# Altium PCB PCB.PcbDoc
Units mm, origin at the board's own origin, x right, y up, seen from the top; angles counter-clockwise.
Board outline 80 x 100 mm, 2 copper layers (Top Layer, Bottom Layer); 72 components, 53 nets, 209 pads, 7 vias.
Unrouted connection lines stored in the file: 1.
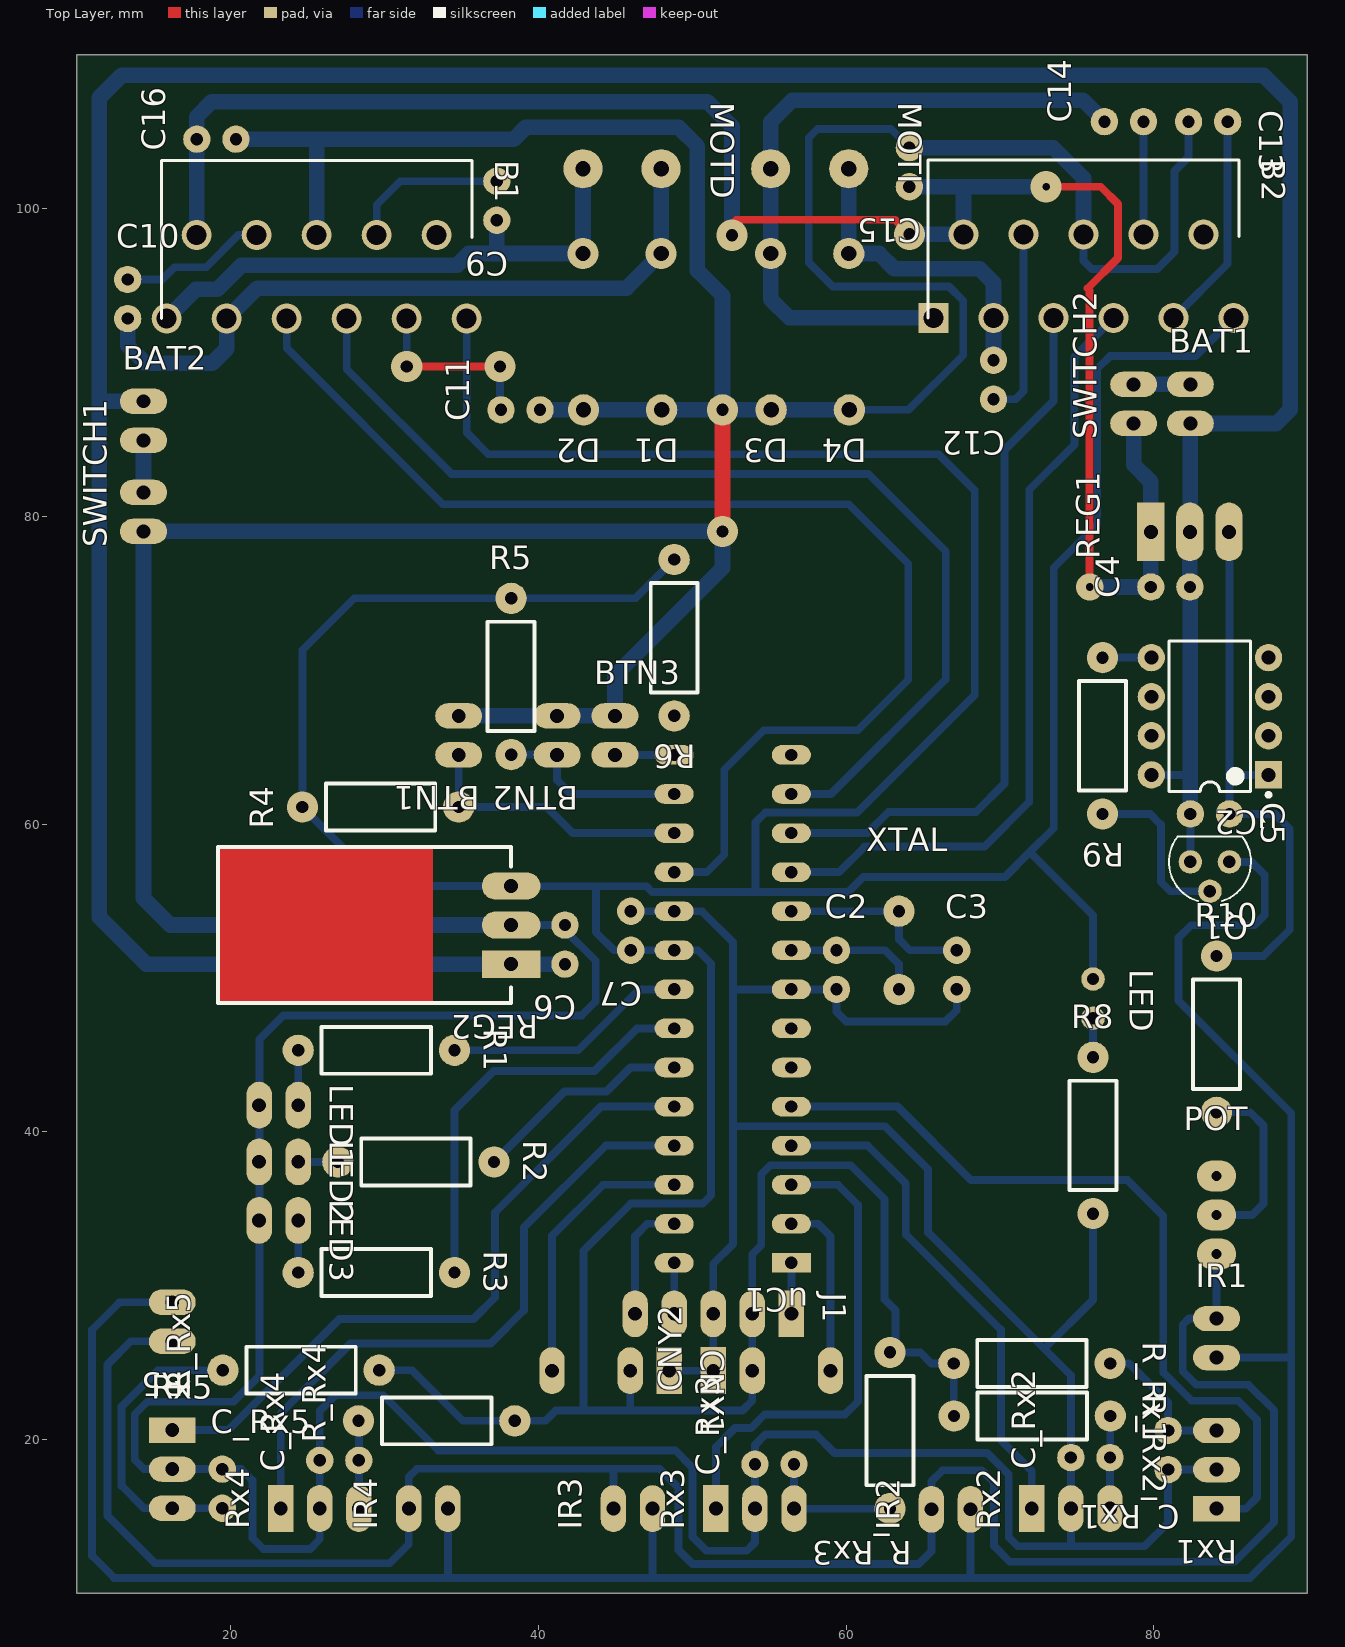
[diagram p0: Top Layer view]
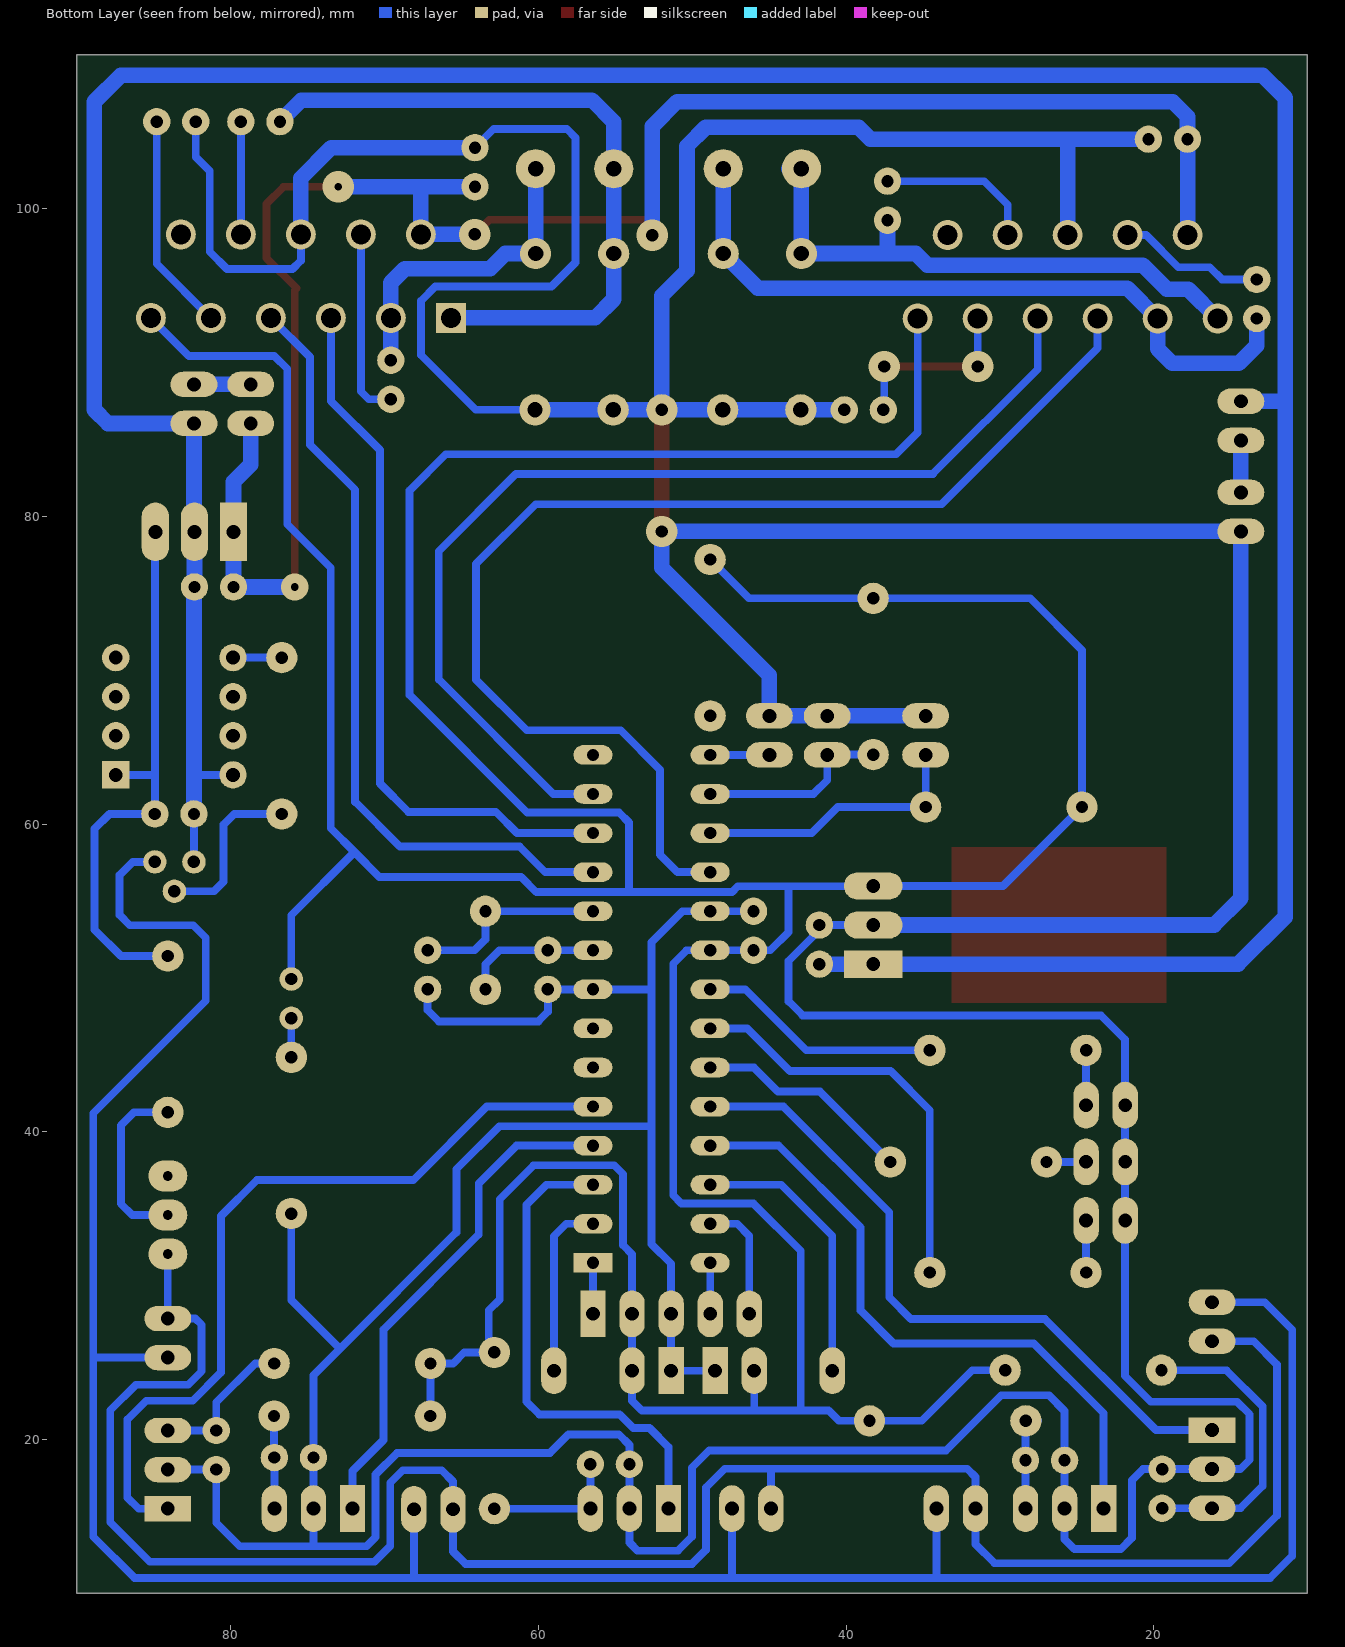
[diagram p1: Bottom Layer view, seen from below]
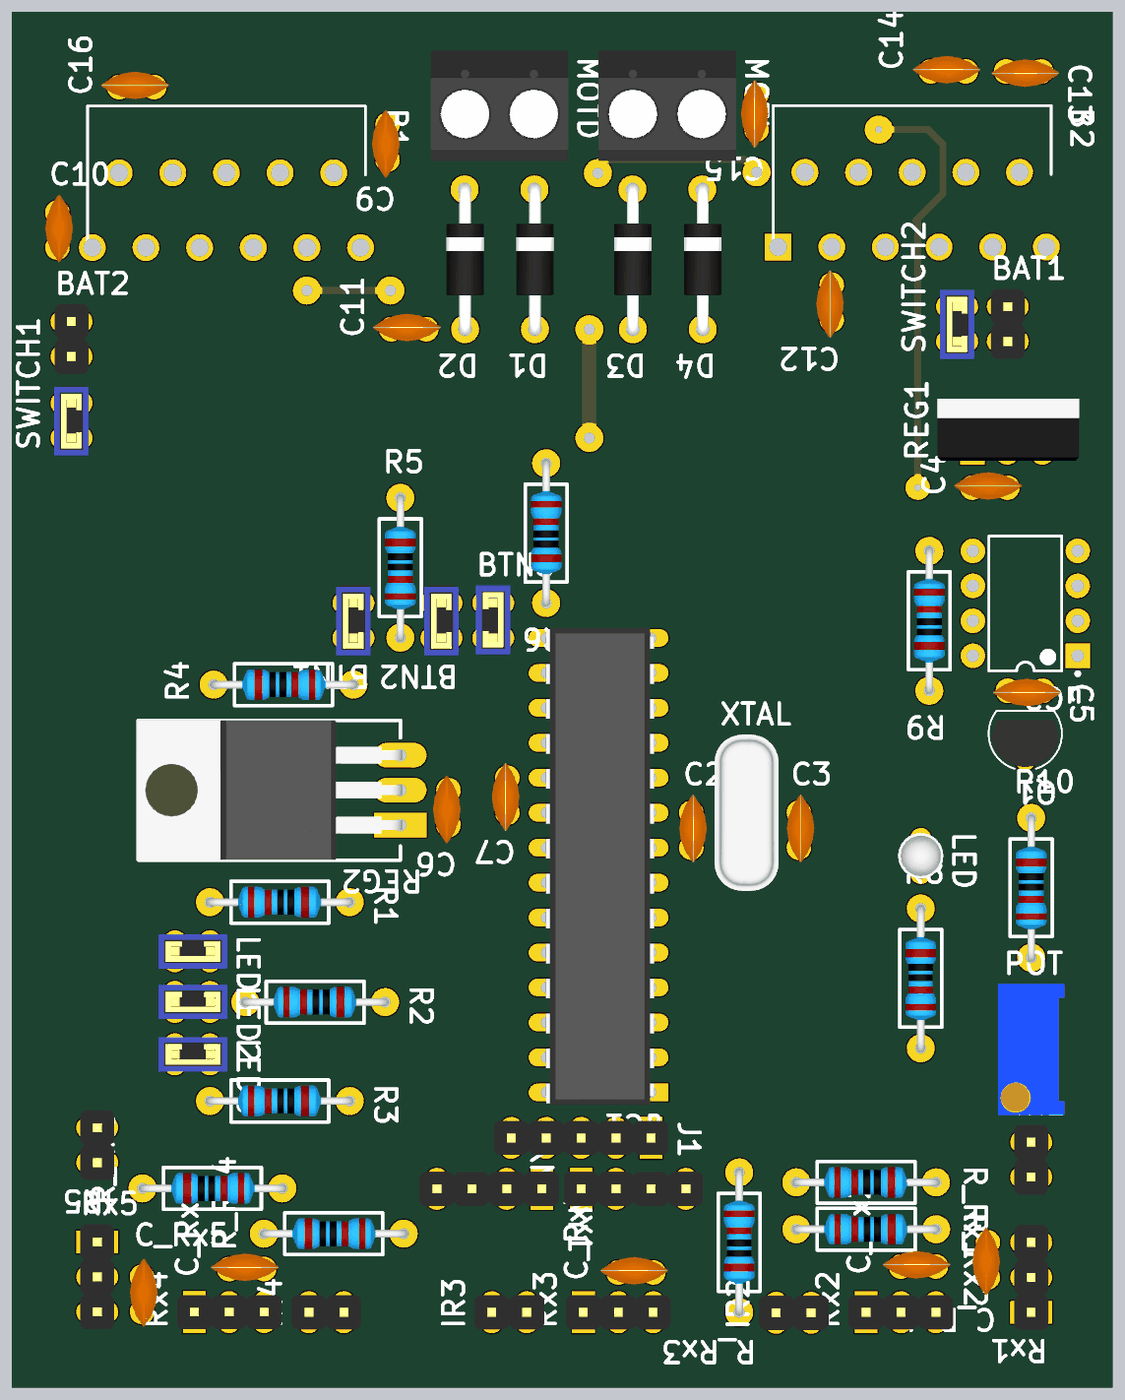
[diagram p2: 3D render of the assembled board from above, using the file's embedded part models]

## Layer stack, top to bottom
Top Solder: solder mask 0.0102, Solder Resist, Dk 3.5
Top Layer: signal copper 0.0356
Dielectric 1: dielectric 0.32, FR-4, Dk 4.8
Bottom Layer: signal copper 0.0356
Bottom Solder: solder mask 0.0102, Solder Resist, Dk 3.5

## Board outline
10,10 90,10 90,110 10,110

## Design rules (kind name [scope] priority, off if disabled: settings)
Clearance [All] p1: gap=0.254
PolygonConnect [All] p1: connectstyle=Relief reliefconductorwidth=0.254 reliefentries=4 polygonreliefangle="90 Angle" airgapwidth=0.254
RoutingVias [All] p1: holewidth=0.8 width=2.032 viastyle="Through Hole" minholewidth=0 minwidth=0 maxholewidth=2.54 maxwidth=2.54
SolderMaskExpansion [All] p1: expansion=0.102
Width [All] p1: maxlimit=1.27 minlimit=0.508 preferedwidth=0.762
30 further rules are at their usual default settings.

## Components (designator, comment, footprint, x,y, rotation, side; value= is the part's Value field where it differs from the comment)
B1 "L6203" TO195P500X2020X2210-11P#1 15.84,92.86 r0 top
B2 "L6203" TO195P500X2020X2210-11P#2 65.69,92.9 r0 top
BAT1 "" "HEADER 1x2" 82.389,87.31 r0 top
BAT2 "" "HEADER 1x2" 14.33,86.21 r0 top
BTN1 "JUMPER" JUMPER 34.82,65.76 r180 top
BTN2 "JUMPER" JUMPER 41.22,65.76 r180 top
BTN3 "JUMPER" JUMPER 44.98,65.76 r0 top
C2 "CAP-CER" CAP-CER 59.38,50.901 r90 top
C3 "CAP-CER" CAP-CER 67.2,50.901 r90 top
C4 "CAP-CER" CAP-CER 80.707,75.41 r180 top
C5 "CAP-CER" CAP-CER 84.04,60.655 r0 top
C6 "CAP-CER" CAP-CER 41.73,51.779 r270 top
C7 "CAP-CER" CAP-CER 46.01,52.679 r270 top
C9 "CAP-CER" CAP-CER 37.3,100.139 r270 top
C10 "CAP-CER" CAP-CER 13.3,94.511 r90 top
C11 "CAP-CER" CAP-CER 38.46,86.925 r180 top
C12 "CAP-CER" CAP-CER 69.59,88.499 r270 top
C13 "CAP-CER" CAP-CER 83.92,105.66 r0 top
C14 "CAP-CER" CAP-CER 77.689,105.66 r180 top
C15 "CAP-CER" CAP-CER 64.12,102.32 r270 top
C16 "CAP-CER" CAP-CER 18.689,104.52 r180 top
C_Rx1 "CAP-CER" CAP-CER 80.94,18.919 r270 top
C_Rx2 "CAP-CER" CAP-CER 75.509,18.81 r180 top
C_Rx3 "CAP-CER" CAP-CER 54.969,18.38 r180 top
C_Rx4 "CAP-CER" CAP-CER 26.679,18.63 r180 top
C_Rx5 "CAP-CER" CAP-CER 19.45,17.171 r90 top
CNY1 "CNY_HEADER" CNY_HEADER 44.7,24.46 r270 top
CNY2 "CNY_HEADER" CNY_HEADER 55.18,24.46 r90 top
D1 "DIODE" DO-41 47.98,92.64 r270 top
D2 "DIODE" DO-41 42.9,92.64 r270 top
D3 "DIODE" DO-41 55.1,92.64 r270 top
D4 "DIODE" DO-41 60.18,92.64 r270 top
IR1 "" "HEADER 1x2" 84.09,26.58 r0 top
IR2 "" "HEADER 1x2" 66.82,15.45 r90 top
IR3 "" "HEADER 1x2" 46.15,15.49 r90 top
IR4 "" "HEADER 1x2" 32.85,15.49 r90 top
IR5 "" "HEADER 1x2" 16.2,27.64 r180 top
J1 "" "Header 1x5" 56.45,28.16 r270 top
LED "LED" LED-3MM-RED 76.06,48.65 r270 top
LED1 "JUMPER" JUMPER 23.12,41.72 r270 top
LED2 "JUMPER" JUMPER 23.12,38.04 r270 top
LED3 "JUMPER" JUMPER 23.12,34.23 r270 top
MOTD "2-BLOCK_TERMINAL" BLOCK_TERMINAL-2 44.17,113.903 r270 top
MOTI "2-BLOCK_TERMINAL" BLOCK_TERMINAL-2 56.37,113.903 r270 top
POT "POT" POT-10TURN 84.09,34.58 r90 top
Q1 "2N2222A" TO-92 83.659,56.582 r180 top
R1 "RES" RES-Axial-400mil 24.39,45.29 r0 top
R2 "RES" RES-Axial-400mil 26.96,38.03 r0 top
R3 "RES" RES-Axial-400mil 24.39,30.84 r0 top
R4 "RES" RES-Axial-400mil 34.82,61.1 r180 top
R5 "RES" RES-Axial-400mil 38.23,64.51 r90 top
R6 "RES" RES-Axial-400mil 48.83,77.19 r270 top
R8 "RES" RES-Axial-400mil 76.06,34.672 r90 top
R9 "RES" RES-Axial-400mil 76.68,70.815 r270 top
R10 "" RES-Axial-400mil 84.09,41.255 r90 top
R_Rx1 "RES" RES-Axial-400mil 67.01,24.93 r0 top
R_Rx2 "RES" RES-Axial-400mil 67.02,21.52 r0 top
R_Rx3 "RES" RES-Axial-400mil 62.86,25.65 r270 top
R_Rx4 "RES" RES-Axial-400mil 38.47,21.2 r180 top
R_Rx5 "RES" RES-Axial-400mil 29.65,24.49 r180 top
REG1 "LM7805" TO-220-STRAIGHT 79.818,78.99 r90 top
REG2 "LM7805" TO-220-FLAT 38.23,50.89 r180 top
Rx1 "Header 1x3" "Header 1x3" 84.09,15.49 r180 top
Rx2 "Header 1x3" "Header 1x3" 72.08,15.49 r90 top
Rx3 "Header 1x3" "Header 1x3" 51.54,15.49 r90 top
Rx4 "Header 1x3" "Header 1x3" 23.25,15.5 r90 top
Rx5 "Header 1x3" "Header 1x3" 16.2,20.6 r0 top
SWITCH1 "JUMPER" JUMPER 14.33,80.29 r180 top
SWITCH2 "JUMPER" JUMPER 78.699,87.31 r180 top
uC1 "PIC18F2550" DIP28 56.45,31.47 r180 top
uC2 "PIC12F683-I/P" PDIP300-P8 83.66,67.005 r180 top
XTAL "" CRYSTAL-TH 63.44,51.282 r90 top

## Footprints (in the part's own frame and the unit in brackets; to place one, negate y for a bottom-side part, rotate by r counter-clockwise, add the part's x,y. Pads: shape width x height; smd on the part's side, far side on the other; paste and mask are expansions set on the pad)
BLOCK_TERMINAL-2 [mm]
  round 2.54 hole 1: 1(11.303,3.81) 2(11.303,-1.27)
  body extent 6.73,-3.73 14.73,6.27, height 10.16
CAP-CER [mil]
  round 70 hole 31.5: 1(-65,0) 2(35,0)
  body extent -107,-44 87,34, height 207
CNY_HEADER [mil]
  rect 120x65 hole 35.43: 1(0,150)
  oval 120x65 hole 35.43: 2(0,50) 3(0,-150)
  body extent -49,-200 49,200, height 336
CRYSTAL-TH [mil]
  round 80 hole 31.5: 1(-80,0) 2(120,0)
  body extent -203,-90 243,93, height 138
DIP28 [mm]
  rect 2.54x1.27 hole 0.8: 1(0,0)
  oval 2.54x1.27 hole 0.8: 2(0,-2.54) 3(0,-5.08) 4(0,-7.62) 5(0,-10.16) 6(0,-12.7) 7(0,-15.24) 8(0,-17.78) 9(0,-20.32) 10(0,-22.86) 11(0,-25.4) 12(0,-27.94) 13(0,-30.48) 14(0,-33.02) 15(7.62,-33.02) 16(7.62,-30.48) 17(7.62,-27.94) 18(7.62,-25.4) 19(7.62,-22.86) 20(7.62,-20.32) 21(7.62,-17.78) 22(7.62,-15.24) 23(7.62,-12.7) 24(7.62,-10.16) 25(7.62,-7.62) 26(7.62,-5.08) 27(7.62,-2.54) 28(7.62,0)
  body extent -0.25,-33.76 7.65,0.89, height 5.09
DO-41 [mil]
  round 80 hole 39.37: A(224.99,1.45) K(-175,0)
  body extent -192,-52 242,55, height 107
"HEADER 1x2" [mil]
  oval 120x65 hole 35.43: 1(0,50) 2(0,-50)
  body extent -49,-100 49,100, height 336
"Header 1x3" [mil]
  rect 120x65 hole 35.43: 1(0,0)
  oval 120x65 hole 35.43: 2(0,-100) 3(0,-200)
  body extent -49,-250 49,50, height 336
"Header 1x5" [mil]
  rect 120x65 hole 35.43: 1(0,0)
  oval 120x65 hole 35.43: 2(0,-100) 3(0,-200) 4(0,-300) 5(0,-400)
  body extent -49,-450 49,50, height 336
JUMPER [mil]
  oval 120x65 hole 35.43: 1(0,50) 2(0,-50)
  body extent -49,-100 49,100, height 350
LED-3MM-RED [mil]
  round 60 hole 31.5: A(-50,0) K(50,0)
  body extent -66,-65 64,65, height 217
PDIP300-P8 [mil] "DIP, 8-Leads, Row Spacing 7.62mm, Pitch 2.54mm, Body 9.5x6.6mm"
  rect 70x70 hole 35.43: 1(-150,150)
  round 70 hole 35.43: 2(-150,50) 3(-150,-50) 4(-150,-150) 5(150,-150) 6(150,-50) 7(150,50) 8(150,150)
  silkscreen extent -155,-193 104,206, body extent -140,-193 140,193, height 210
POT-10TURN [mil]
  oval 80x100 hole 25: 1(-100,0) 2(0,0) 3(100,0)
  body extent -188,-94 188,94, height 455
RES-Axial-400mil [mil]
  round 80 hole 31.5: 1(0,0) 2(400,0)
  silkscreen extent 60,-60 340,60, body extent -12,-44 410,44, height 94
TO195P500X2020X2210-11P#1 [mm]
  round 1.95 hole 1.3: 1(0,0) 2(1.95,5.43) 3(3.9,0) 4(5.85,5.43) 5(7.8,0) 6(9.75,5.43) 7(11.7,0) 8(13.65,5.43) 9(15.6,0) 10(17.55,5.43) 11(19.5,0)
  silkscreen extent -0.35,0 19.85,10.28
TO195P500X2020X2210-11P#2 [mm]
  rect 1.95x1.95 / inner round 1.95 / far side rect 1.95x1.95 hole 1.3: 1(0,0)
  round 1.95 hole 1.3: 2(1.95,5.43) 3(3.9,0) 4(5.85,5.43) 5(7.8,0) 6(9.75,5.43) 7(11.7,0) 8(13.65,5.43) 9(15.6,0) 10(17.55,5.43) 11(19.5,0)
  silkscreen extent -0.35,0 19.85,10.28
TO-92 [mil]
  round 60 hole 32: B(0,37.5) C(-50,-37.5) E(50,-37.5)
  Top Layer region: -25.57,-28.61 -39.01,-13.94 -58.89,-13.07 -73.56,-26.51 -74.43,-46.39 -60.99,-61.06 -41.11,-61.93 -26.44,-48.49
  Top Layer region: 24.43,46.39 10.99,61.06 -8.89,61.93 -23.56,48.49 -24.43,28.61 -10.99,13.94 8.89,13.07 23.56,26.51
  Top Layer region: 74.43,-28.61 60.99,-13.94 41.11,-13.07 26.44,-26.51 25.57,-46.39 39.01,-61.06 58.89,-61.93 73.56,-48.49
  Bottom Layer region: -25.57,-28.61 -39.01,-13.94 -58.89,-13.07 -73.56,-26.51 -74.43,-46.39 -60.99,-61.06 -41.11,-61.93 -26.44,-48.49
  Bottom Layer region: 24.43,46.39 10.99,61.06 -8.89,61.93 -23.56,48.49 -24.43,28.61 -10.99,13.94 8.89,13.07 23.56,26.51
  Bottom Layer region: 74.43,-28.61 60.99,-13.94 41.11,-13.07 26.44,-26.51 25.57,-46.39 39.01,-61.06 58.89,-61.93 73.56,-48.49
  Multi-Layer region: -25.57,-28.61 -39.01,-13.94 -58.89,-13.07 -73.56,-26.51 -74.43,-46.39 -60.99,-61.06 -41.11,-61.93 -26.44,-48.49
  Multi-Layer region: 24.43,46.39 10.99,61.06 -8.89,61.93 -23.56,48.49 -24.43,28.61 -10.99,13.94 8.89,13.07 23.56,26.51
  Multi-Layer region: 74.43,-28.61 60.99,-13.94 41.11,-13.07 26.44,-26.51 25.57,-46.39 39.01,-61.06 58.89,-61.93 73.56,-48.49
  silkscreen extent -105,-103 105,63, body extent -95,-77 95,58, height 290
TO-220-FLAT [mm]
  rect 3.81x1.778 hole 0.9: 1(0,0)
  oval 3.81x1.778 hole 0.9: 2(0,-2.54) 3(0,-5.08)
  Top Layer region: 5.08,-7.62 19.05,-7.62 19.05,2.54 5.08,2.54
  silkscreen extent 0,-7.62 19.05,2.54, body extent -0.12,-7.62 19.16,2.54, height 4.96
TO-220-STRAIGHT [mm]
  rect 3.81x1.778 hole 0.9: 1(0,0)
  oval 3.81x1.778 hole 0.9: 2(0,-2.54) 3(0,-5.08)
  body extent -1.61,-7.75 2.88,2.55, height 16.8

## Part data
B1 B2: "DC motor controller,L6203 0-48V STMicroelectronics L6203, Motor Controller Full Bridge Motor,, 11-Pin MULTIWATT V"
BAT1 BAT2 IR1 IR2 IR3 IR4 IR5: library part "Header 1x2"
J1: library part "Header Programmer"
Q1: library part NPN
R10: library part RES
REG1 REG2: library part LM78XX
uC2: "Flash-Based 8-Bit CMOS Microcontroller with nanoWatt Technology, 2K (x14-Bit words) Program Memory, 384 Bytes Data Memory, 8-Pin PDIP, Industrial Temperature"
XTAL: library part XTAL

## Free pads (board coordinates)
  round 2.032 hole 0.8: 2(51.97,86.925)

## Via types
v1: diameter 2.032, hole 0.8, Top Layer to Bottom Layer, 5 vias
v2: diameter 1.778, hole 0.5, Top Layer to Bottom Layer, 1 vias
v3: diameter 2.032, hole 0.5, Top Layer to Bottom Layer, 1 vias

## Nets (pads, with @x,y where several pads share a name; then routed paths per layer and width w, separated by ;. In a path a pad name is that pad's centre, name@x,y a point inside that pad or via, vN(x,y) a via of type N, cw(c..) or ccw(c..) an arc to the next point about the centre after c; other vN are vias at no path point)
38K: R9.1 uC2.5 | length 3.2
  Bottom Layer w0.508: R9.1 uC2.5
BAT1: B1.2 B2.2 C4.2 C15.2 C16.2 REG1.1 SWITCH2.1 | length 125.7
  Top Layer w0.508: v1@51.92,98.65 52.3,98.27 v1(52.59,98.27) 52.59,99 52.87,99.28 63.18,99.28 v1(64.13,98.33) ; v3(73.009,101.431) 76.559,101.431 77.68,100.31 77.68,96.8 75.71,94.83 75.84,94.7 v2(75.84,75.41)
  Bottom Layer w1.016: B1.2 17.79,104.51 C16.2 17.8,105.99 18.77,106.96 50.98,106.96 52.59,105.35 v1(52.59,98.27) ; C15.2 67.64,101.431 ; v1(64.13,98.33) B2.2 67.64,101.431 ; v3(73.009,101.431) 67.64,101.431 ; v2(75.84,75.41) C4.2 REG1.1 79.818,82.251 78.699,83.37 SWITCH2.1
BAT2: BAT1.2 BAT2.1 C4.1 C5.1 C6.2 Q1.E REG1.2 REG2.1 uC2.8 | length 224.4
  Bottom Layer w0.508: uC2.8 82.389,63.195 ; Q1.E C5.1
  Bottom Layer w1.016: BAT2.1 11.45,87.48 ; C6.2 REG2.1 14.51,50.89 11.45,53.95 11.45,87.48 ; C4.1 REG1.2 82.389,79.021 BAT1.2 86.019,86.04 87.98,86.04 88.87,86.93 88.87,106.95 87.14,108.68 12.92,108.68 11.45,107.21 11.45,87.48 ; C5.1 82.389,63.195 C4.1@82.389,75.41
BTN1: BTN1.1 R4.1 uC1.17 | length 18.1
  Bottom Layer w0.508: BTN1.1 R4.1 40.54,61.1 42.23,59.41 uC1.17
BTN2: BTN2.1 R5.1 uC1.16 | length 12.6
  Bottom Layer w0.508: R5.1 41.2,64.51 BTN2.1 41.22,62.85 42.12,61.95 uC1.16
BTN3: BTN3.2 R6.2 uC1.15 | length 3.9
  Bottom Layer w0.508: BTN3.2 uC1.15
CNY1: CNY1.3 uC1.26 | length 18.1
  Bottom Layer w0.508: CNY1.3 40.89,33.23 44.21,36.55 uC1.26
CNY2: CNY2.3 uC1.2 | length 11.6
  Bottom Layer w0.508: uC1.2 58.18,34.01 58.99,33.2 CNY2.3
GND: B1.6 B2.6 BTN1.2 BTN2.2 BTN3.1 C2.1 C3.1 C6.1 C7.1 C11.1 C13.1 C15.1 C16.1 C_Rx1.2 C_Rx2.2 C_Rx3.2 C_Rx4.2 C_Rx5.2 CNY1.1 CNY2.1 D1.A D2.A D3.A D4.A J1.3 LED1.2 LED2.2 LED3.2 pad.2 R8.1 REG2.2 Rx1.2 Rx2.2 Rx3.2 Rx4.2 Rx5.2 SWITCH1.1 uC1.8 uC1.19 | length 547.2
  Top Layer w1.016: v1(51.97,79.02) 51.97,86.865 51.94,86.895 pad.2
  Bottom Layer w0.508: REG2.2 C6.1 41.73,53.1 43.73,51.1 43.73,48.47 42.82,47.56 23.43,47.56 21.87,46 21.87,41.72 21.87,24.13 20.18,22.44 14.58,22.44 13.76,21.62 13.76,18.67 14.37,18.06 Rx5.2 C_Rx5.2 20.69,18.06 21.41,17.34 21.41,13.59 22.14,12.86 25.15,12.86 25.79,13.5 Rx4.2 C_Rx4.2 25.79,21.842 26.808,22.86 29.91,22.86 33.49,19.28 48.89,19.28 50.02,18.15 50.02,13.67 50.93,12.76 53.55,12.76 54.08,13.29 Rx3.2 C_Rx3.2 54.08,19.63 54.77,20.32 58.04,20.32 59.25,19.11 69.18,19.11 70.582,17.708 70.582,13.638 71.17,13.05 74.62,13.05 ; C7.1 uC1.19 50.63,54.33 52.65,52.31 52.65,49.25 ; CNY1.1 CNY2.1 J1.3 51.37,31.41 52.65,32.69 52.65,40.35 ; D4.A 64.065,86.925 67.62,90.48 67.62,94.02 66.7,94.94 59.14,94.94 57.58,96.5 57.58,104.61 58.16,105.19 62.901,105.19 C15.1 ; C3.1 67.2,47.9 66.47,47.17 60,47.17 59.38,47.79 C2.1 uC1.8 52.65,49.25 ; B2.6 75.44,96.62 75.98,96.08 80.24,96.08 81.36,97.2 81.36,102.45 82.269,103.359 C13.1 ; R8.1 76.06,29.06 72.89,25.89 ; Rx1.2 C_Rx1.2 80.94,14.58 79.41,13.05 74.62,13.05 ; 52.65,40.35 52.65,49.25 ; 52.65,40.35 62.53,40.35 65.33,37.55 65.33,33.45 72.89,25.89 ; 72.89,25.89 74.62,24.16 C_Rx2.2 Rx2.2 74.62,13.05
  Bottom Layer w1.016: C16.1 25.59,104.52 ; B1.6 25.59,104.52 ; BTN1.2 BTN2.2 BTN3.1 44.98,69.66 51.97,76.65 v1(51.97,79.02) SWITCH1.1 14.33,55.17 16.07,53.43 REG2.2 ; C11.1 D2.A ; D2.A@43.747,86.925 pad.2 ; D4.A pad.2 ; C15.1 73.461,103.971 75.44,101.992 B2.6 ; 25.59,104.52 38.41,104.52 39.18,105.29 49.12,105.29 50.34,104.07 50.34,95.98 51.97,94.35 pad.2
IR1: Rx1.1 uC1.5 | length 52.7
  Bottom Layer w0.508: uC1.5 63.35,41.63 68.13,36.85 78.3,36.85 80.63,34.52 80.63,24.35 82.47,22.51 85.49,22.51 86.72,21.28 86.72,16.22 85.98,15.48 84.1,15.48 Rx1.1
IR2: Rx2.1 uC1.4 | length 33
  Bottom Layer w0.508: uC1.4 61.42,39.09 63.88,36.63 63.88,33.32 70.07,27.13 70.07,19.95 72.08,17.94 Rx2.1
IR3: Rx3.1 uC1.3 | length 32.1
  Bottom Layer w0.508: Rx3.1 51.54,19.49 52.78,20.73 53.83,20.73 54.72,21.62 59.94,21.62 60.77,22.45 60.77,35.25 59.47,36.55 uC1.3
IR4: Rx4.1 uC1.25 | length 42.1
  Bottom Layer w0.508: Rx4.1 23.25,21.69 27.79,26.23 36.91,26.23 39.06,28.38 39.06,33.77 44.38,39.09 uC1.25
IR5: Rx5.1 uC1.24 | length 44.6
  Bottom Layer w0.508: Rx5.1 19.85,20.6 27.07,27.82 35.78,27.82 37.19,29.23 37.19,34.75 44.07,41.63 uC1.24
LED1: R1.2 uC1.21 | length 15.9
  Bottom Layer w0.508: R1.2 42.59,45.29 46.55,49.25 uC1.21
LED2: R2.2 uC1.23 | length 14.3
  Bottom Layer w0.508: R2.2 41.7,42.61 44.43,42.61 45.99,44.17 uC1.23
LED3: R3.2 uC1.22 | length 27
  Bottom Layer w0.508: R3.2 34.55,41.39 37.1,43.94 43.65,43.94 46.42,46.71 uC1.22
M1_D: B1.5 uC1.18 | length 79.3
  Bottom Layer w0.508: B1.5 23.64,90.94 33.79,80.79 60.17,80.79 64.05,76.91 64.05,69.38 60.76,66.09 54.65,66.09 52.09,63.53 52.09,58.01 50.95,56.87 uC1.18
M1_P: B1.7 uC1.13 | length 68.6
  Bottom Layer w0.508: B1.7 27.54,89.57 34.35,82.76 61.45,82.76 66.48,77.73 66.48,69.4 59.03,61.95 uC1.13
M1A: B1.1 C9.2 D2.K MOTD.2 | length 36.8
  Bottom Layer w1.016: B1.1 17.746,94.766 19.136,94.766 20.7,96.33 34.71,96.33 35.465,97.085 37.3,97.085 ; C9.2 37.3,97.085 ; MOTD.2@43.71,102.6 42.9,101.79 D2.K 37.3,97.085
M1B: B1.3 C10.1 D1.K MOTD.1 | length 45.7
  Bottom Layer w1.016: C10.1 13.3,91.11 14.46,89.95 18.8,89.95 19.74,90.89 B1.3 21.72,94.84 45.735,94.84 D1.K MOTD.1@47.98,101.79
M2_D: B2.7 uC1.11 | length 51.1
  Bottom Layer w0.508: uC1.11 59.55,56.87 61.21,58.53 69,58.53 71.91,61.44 71.91,81.72 74.85,84.66 74.85,90.36 B2.7
M2_P: B2.5 uC1.12 | length 46.8
  Bottom Layer w0.508: uC1.12 61.39,59.41 62.77,60.79 68.46,60.79 70.3,62.63 70.3,84.31 73.49,87.5 B2.5
M2A: B2.1 C14.2 D3.K MOTI.2 | length 45.5
  Bottom Layer w1.016: B2.1 56.32,92.9 55.1,94.12 D3.K MOTI.2 55.1,105.64 56.52,107.06 75.4,107.06 C14.2
M2B: B2.3 C12.1 D4.K MOTI.1 | length 20.7
  Bottom Layer w1.016: MOTI.1 D4.K 62.155,97.085 63.14,96.1 68.68,96.1 69.59,95.19 B2.3 C12.1
MCLR: J1.1 uC1.1 | length 3.3
  Bottom Layer w0.508: J1.1 uC1.1
NetB1_4: B1.4 C10.2 | length 9.6
  Bottom Layer w0.508: C10.2 15.55,95.4 16.35,96.2 18.4,96.2 20.49,98.29 B1.4
NetB1_8: B1.8 C9.1 | length 10.4
  Bottom Layer w0.508: B1.8 29.49,100.26 31.02,101.79 C9.1
NetB1_9: B1.9 C11.2 | length 12
  Top Layer w0.508: v1(31.44,89.74) v1(37.51,89.74)
  Bottom Layer w0.508: v1(31.44,89.74) B1.9 ; v1(37.51,89.74) 37.51,86.986 C11.2
NetB2_4: B2.4 C12.2 | length 12.4
  Bottom Layer w0.508: C12.2 71.02,87.61 71.54,88.13 B2.4
NetB2_8: B2.8 C14.1 | length 7.3
  Bottom Layer w0.508: B2.8 C14.1
NetB2_9: B2.9 C13.2 | length 14.2
  Bottom Layer w0.508: B2.9 84.809,96.419 C13.2
NetBAT1_1: BAT1.1 SWITCH2.2 | length 3.7
  Bottom Layer w1.016: SWITCH2.2 BAT1.1
NetBAT2_2: BAT2.2 SWITCH1.2 | length 3.4
  Bottom Layer w1.016: SWITCH1.2 BAT2.2
NetC_Rx1_1: C_Rx1.1 R_Rx1.2 Rx1.3 | length 9.8
  Bottom Layer w0.508: R_Rx1.2 78.41,24.93 80.94,22.4 C_Rx1.1 Rx1.3
NetC_Rx2_1: C_Rx2.1 R_Rx2.2 Rx2.3 | length 6
  Bottom Layer w0.508: Rx2.3 C_Rx2.1 77.18,18.83 R_Rx2.2
NetC_Rx3_1: C_Rx3.1 R_Rx3.2 Rx3.3 | length 9.1
  Bottom Layer w0.508: C_Rx3.1 Rx3.3 R_Rx3.2
NetC_Rx4_1: C_Rx4.1 R_Rx4.2 Rx4.3 | length 5.7
  Bottom Layer w0.508: R_Rx4.2@27.51,21.22 R_Rx4.2@27.53,21.2 ; Rx4.3 C_Rx4.1 R_Rx4.2@28.33,21.18
NetC_Rx5_1: C_Rx5.1 R_Rx5.2 Rx5.3 | length 19.9
  Bottom Layer w0.508: R_Rx5.2@19.44,24.19 19.14,24.49 15.27,24.49 12.91,22.13 12.91,16.97 14.36,15.52 Rx5.3 C_Rx5.1
NetIR1_1: IR1.1 IR2.1 IR3.1 IR4.1 IR5.1 POT.1 | length 139.4
  Bottom Layer w0.508: IR5.1 13.5,26.37 11.99,24.86 11.99,15.03 15.08,11.94 30.34,11.94 31.58,13.18 IR4.1 31.58,17.55 32.12,18.09 44.88,18.09 ; IR3.1 44.88,18.09 ; POT.1 IR1.1 82.3,27.85 81.89,27.44 81.89,24.43 82.77,23.55 86.16,23.55 87.83,21.88 87.83,14.61 85.262,12.042 70.648,12.042 69.63,13.06 69.63,17.18 68.82,17.99 66.28,17.99 65.55,17.26 IR2.1 65.55,12.71 64.73,11.89 50.02,11.89 49.11,12.8 49.11,16.86 47.88,18.09 44.88,18.09
NetIR1_2: IR1.2 IR2.2 IR3.2 IR4.2 IR5.2 Q1.C | length 172.2
  Bottom Layer w0.508: IR5.2 12.78,28.91 10.99,27.12 10.99,12.42 12.42,10.99 34.12,10.99 ; IR4.2 34.12,10.99 ; IR3.2 47.42,10.99 ; 67.98,10.99 47.42,10.99 ; IR2.2@68.55,15.49 68.09,15.03 68.09,10.99 86.26,10.99 88.94,13.67 88.94,25.31 ; IR1.2 88.94,25.31 ; Q1.C 86.365,57.535 87.22,56.68 87.22,54.08 86.56,53.42 82.44,53.42 81.62,52.6 81.62,48.51 88.94,41.19 88.94,25.31 ; 34.12,10.99 47.42,10.99
NetLED1_1: LED1.1 R1.1 | length 3.6
  Bottom Layer w0.508: LED1.1 R1.1
NetLED2_1: LED2.1 R2.1 | length 2.6
  Bottom Layer w0.508: LED2.1 24.4,38.03 R2.1
NetLED3_1: LED3.1 R3.1 | length 3.4
  Bottom Layer w0.508: R3.1 LED3.1
NetLED_K: LED.K R8.2 | length 2.5
  Bottom Layer w0.508: R8.2 LED.K
NetPOT_2: POT.2 R10.1 | length 11.8
  Bottom Layer w0.508: POT.2 86.4,34.58 87.14,35.32 87.14,40.4 86.285,41.255 R10.1
NetQ1_B: Q1.B R9.2 | length 11.2
  Bottom Layer w0.508: R9.2 79.775,60.655 80.47,59.96 80.47,56.25 81.09,55.63 Q1.B
PGC: J1.5 uC1.27 | length 7.9
  Bottom Layer w0.508: J1.5 46.29,33.22 47.08,34.01 uC1.27
PGD: J1.4 uC1.28 | length 3.3
  Bottom Layer w0.508: J1.4 uC1.28
VCC: B1.11 B2.11 C7.2 CNY1.2 CNY2.2 J1.2 LED.A R4.2 R5.2 R6.1 R_Rx1.1 R_Rx2.1 R_Rx3.1 R_Rx4.1 R_Rx5.1 REG2.3 uC1.20 | length 335.8
  Bottom Layer w0.508: R_Rx5.1@29.6,24.19 29.9,24.49 31.79,24.49 35.08,21.2 R_Rx4.1 40.46,21.2 41.13,21.87 42.94,21.87 ; B1.11 35.34,85.45 36.75,84.04 66.01,84.04 68.37,81.68 68.37,68.39 60.72,60.74 54.75,60.74 54.11,60.1 54.11,55.57 ; REG2.3@38.23,55.95 43.74,55.95 ; REG2.3 29.79,55.97 R4.2 24.66,71.3 28.03,74.67 R5.2 46.31,74.67 R6.1 ; CNY1.2 45.97,21.87 ; R_Rx2.1 67.01,21.53 R_Rx1.1 65.54,24.93 64.82,25.65 63.22,25.65 63.22,28.38 62.51,29.09 62.51,35.61 60.31,37.81 55.07,37.81 54.49,37.23 54.49,32.61 53.91,32.03 J1.2 CNY2.2 53.91,22.51 53.27,21.87 45.97,21.87 ; LED.A 76.06,54.07 71.955,58.175 ; B2.11 82.72,90.43 77.17,90.43 76.33,89.59 76.33,79.49 73.5,76.66 73.5,59.72 71.955,58.175 ; 42.94,21.87 45.97,21.87 ; 42.94,21.87 42.94,32.25 46.01,35.32 50.69,35.32 51.23,35.86 51.23,50.92 50.36,51.79 uC1.20 C7.2 44.92,51.79 43.74,52.97 43.74,55.95 ; 43.74,55.95 47.03,55.95 47.41,55.57 54.11,55.57 ; 54.11,55.57 60.13,55.57 61.12,56.56 70.34,56.56 71.955,58.175
VIR: C5.2 R10.2 REG1.3 uC2.1 | length 37.2
  Bottom Layer w0.508: R10.2 87.135,51.415 88.85,53.13 88.85,59.69 87.885,60.655 C5.2 84.929,63.195 ; REG1.3@84.929,78.99 84.929,63.195 ; uC2.1 84.929,63.195
XTAL1: C2.2 uC1.9 XTAL.1 | length 9
  Bottom Layer w0.508: uC1.9 C2.2 62.53,51.79 63.44,50.88 XTAL.1
XTAL2: C3.2 uC1.10 XTAL.2 | length 12.9
  Bottom Layer w0.508: uC1.10 XTAL.2 63.44,52.5 64.15,51.79 C3.2
pads on no net: B1.10 B2.10 POT.3 uC1.6 uC1.7 uC1.14 uC2.2 uC2.3 uC2.4 uC2.6 uC2.7

## Silkscreen, mask and mechanical layers (free items; w line width, h text height)
Mechanical 1:
  the board outline again, w0.508